# EAGLE board Spectrum_Shield_Panel_v16 (EAGLE 7.3.0), part 1 of 3
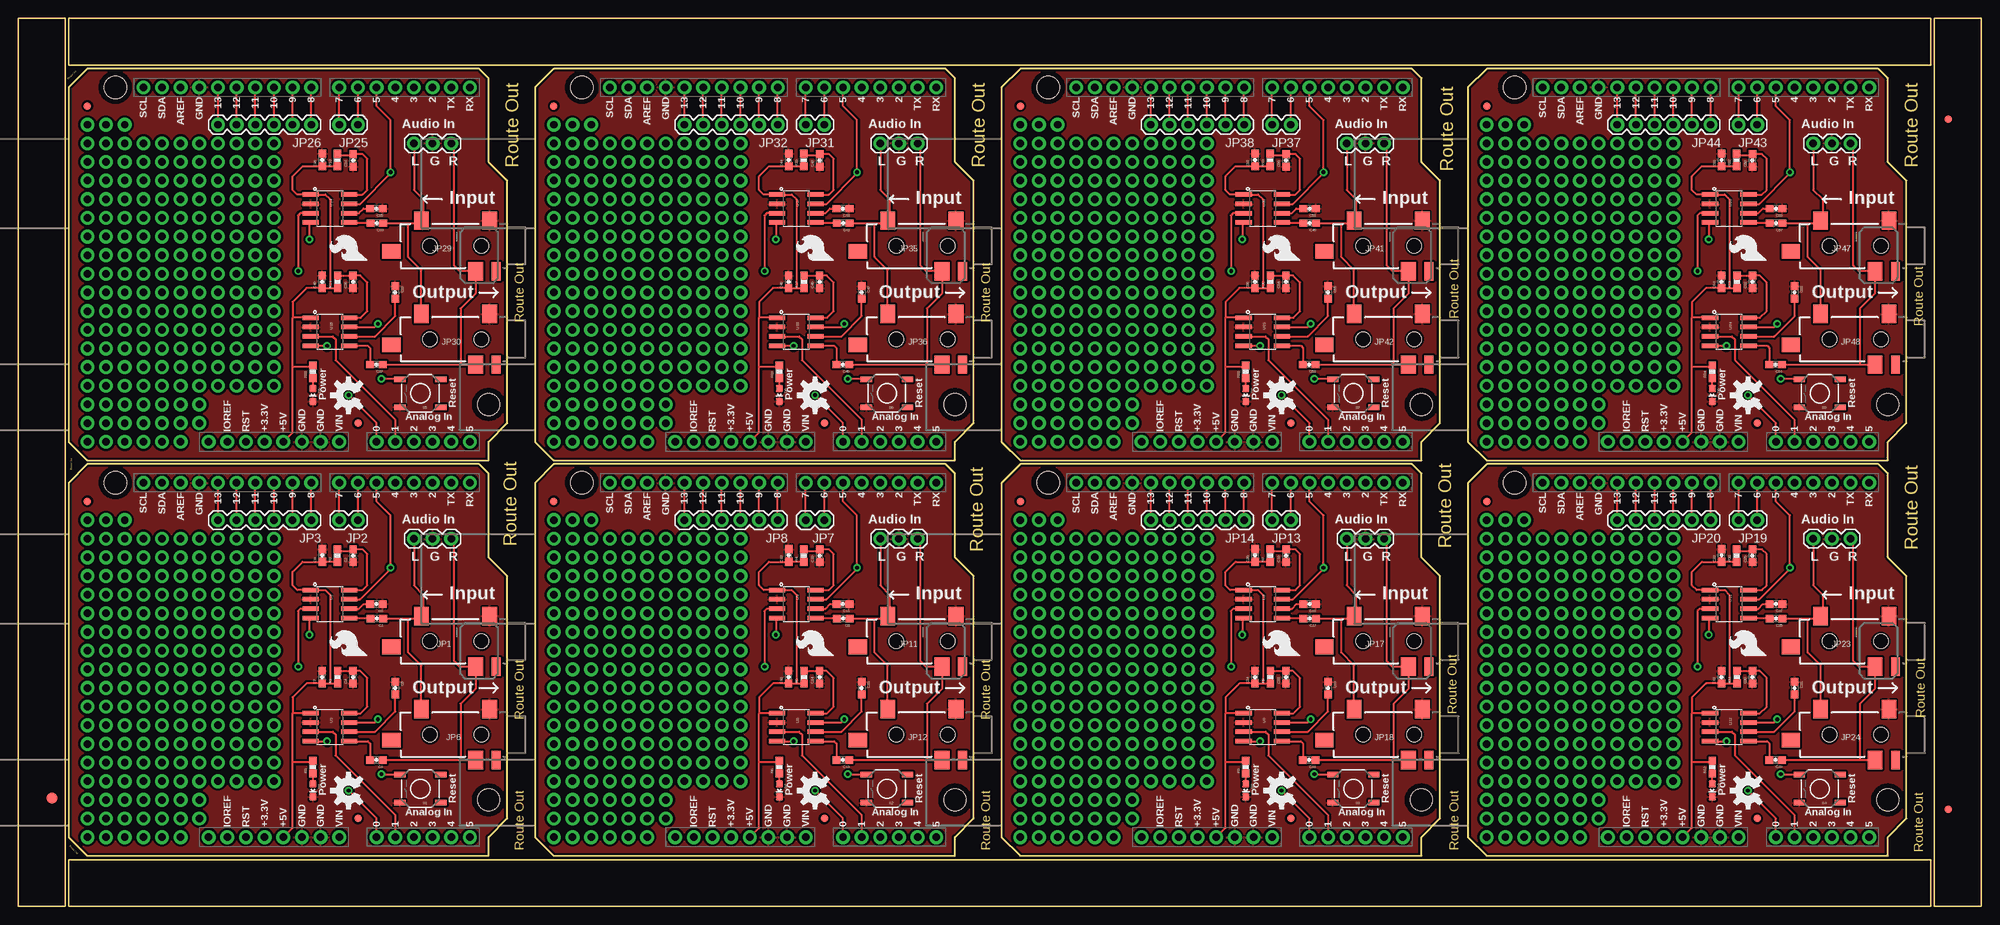
[diagram p0: board, top side]
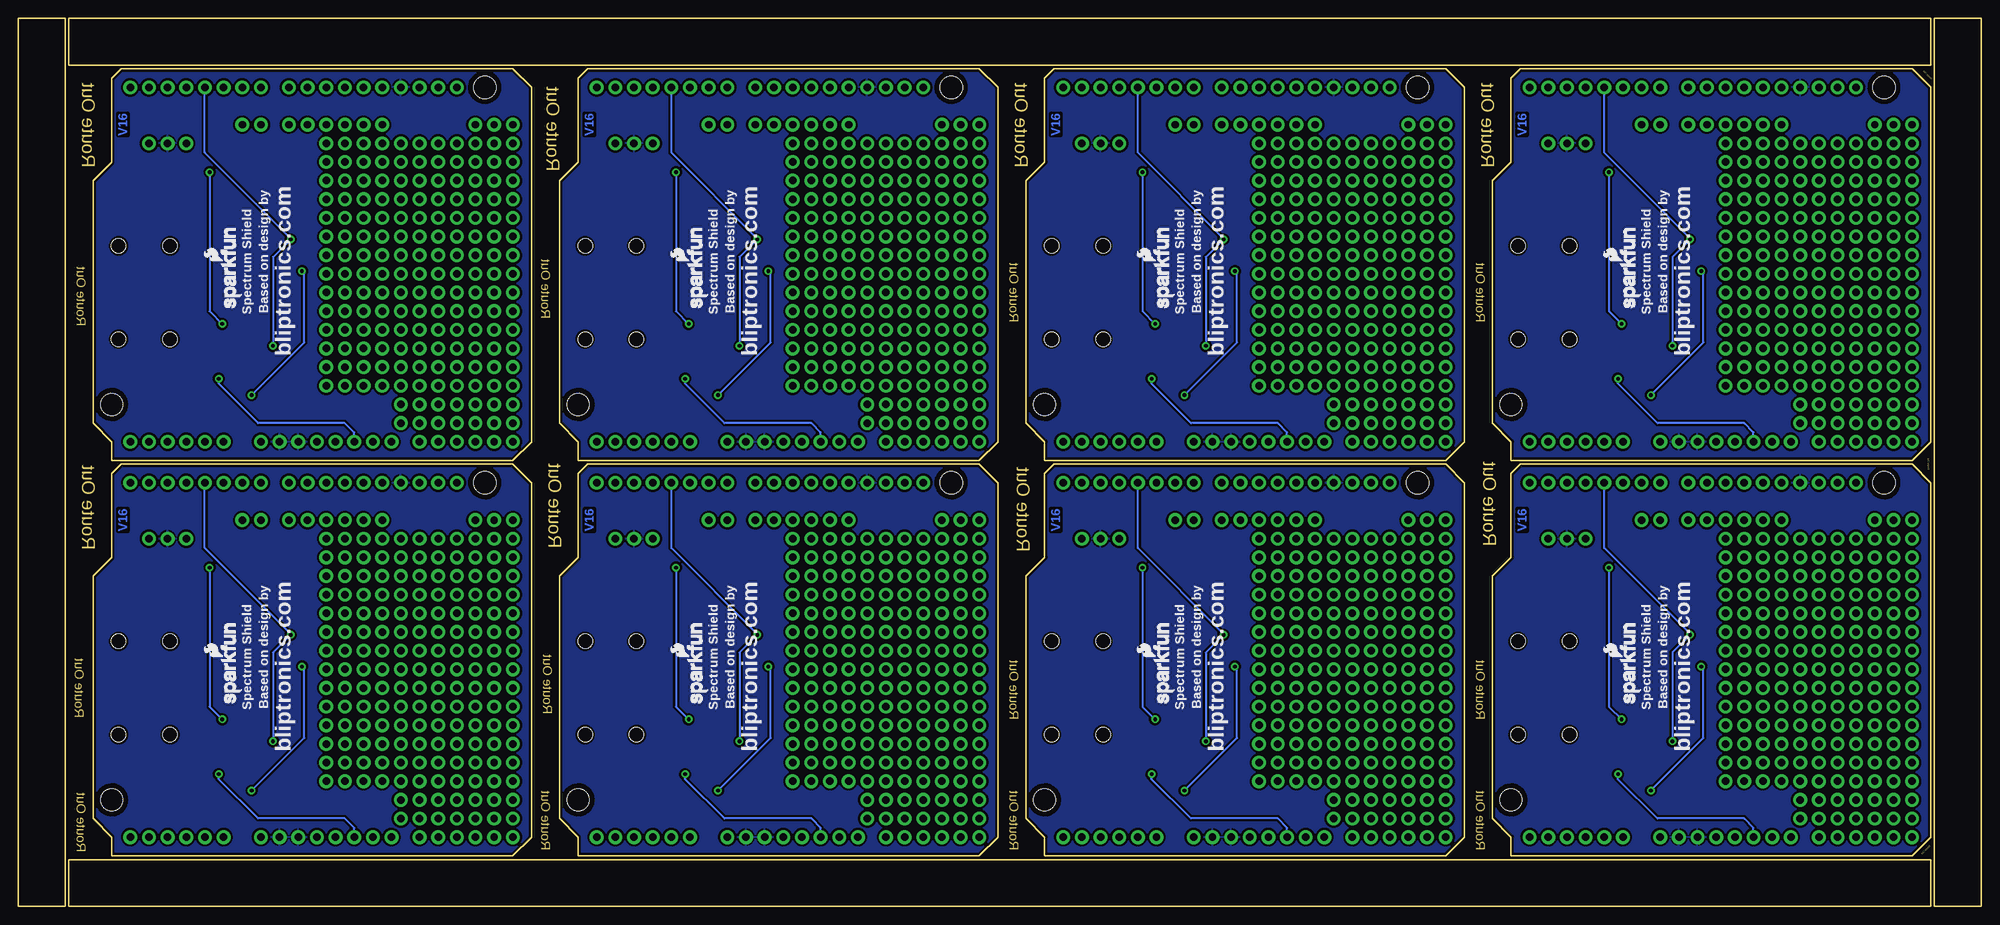
[diagram p1: board, bottom side, seen from below]

Size 267.21 x 120.9 mm. Coordinates in mm from the lower left corner, seen from the top.
Outline: 9.4,6.86 64.01,6.86 64.01,9.4 66.55,11.94 66.55,44.96 64.01,47.5 64.01,58.93 62.74,60.2 9.4,60.2 6.86,57.66 6.86,9.4 9.4,6.86
Outline: 72.9,6.86 127.51,6.86 127.51,9.4 130.05,11.94 130.05,44.96 127.51,47.5 127.51,58.93 126.24,60.2 72.9,60.2 70.36,57.66 70.36,9.4 72.9,6.86
Outline: 136.4,6.86 191.01,6.86 191.01,9.4 193.55,11.94 193.55,44.96 191.01,47.5 191.01,58.93 189.74,60.2 136.4,60.2 133.86,57.66 133.86,9.4 136.4,6.86
Outline: 199.9,6.86 254.51,6.86 254.51,9.4 257.05,11.94 257.05,44.96 254.51,47.5 254.51,58.93 253.24,60.2 199.9,60.2 197.36,57.66 197.36,9.4 199.9,6.86
Outline: 9.4,60.71 64.01,60.71 64.01,63.25 66.55,65.79 66.55,98.81 64.01,101.35 64.01,112.78 62.74,114.05 9.4,114.05 6.86,111.51 6.86,63.25 9.4,60.71
Outline: 72.9,60.71 127.51,60.71 127.51,63.25 130.05,65.79 130.05,98.81 127.51,101.35 127.51,112.78 126.24,114.05 72.9,114.05 70.36,111.51 70.36,63.25 72.9,60.71
Outline: 136.4,60.71 191.01,60.71 191.01,63.25 193.55,65.79 193.55,98.81 191.01,101.35 191.01,112.78 189.74,114.05 136.4,114.05 133.86,111.51 133.86,63.25 136.4,60.71
Outline: 199.9,60.71 254.51,60.71 254.51,63.25 257.05,65.79 257.05,98.81 254.51,101.35 254.51,112.78 253.24,114.05 199.9,114.05 197.36,111.51 197.36,63.25 199.9,60.71
Outline: 267.21,0 267.21,120.9 260.86,120.9 260.86,0 267.21,0
Outline: 0,120.9 0,0 6.35,0 6.35,120.9 0,120.9
Outline: 6.86,114.55 260.35,114.55 260.35,120.9 6.86,120.9 6.86,114.55
Outline: 260.35,6.35 6.86,6.35 6.86,0 260.35,0 260.35,6.35
Copper layers (1*16): Top 0.035mm / dielectric 1.5mm / Bottom 0.035mm
Design rules "SparkFun-2-layer": minimum track width 7mil, minimum drill 15mil, track to track 8mil, track to pad 8mil, pad to pad 8mil, via to via 8mil, smd to smd 8mil, copper to edge 8mil, drill to drill 8mil, minimum pad ring 12mil, minimum via ring 10mil, stop-mask expansion 4mil, vias tented up to drill 20mil, thermal gap 10mil

## Footprints (pad centres in the part's own frame; a part is rotated, then mirrored left to right if it is on the bottom)
1X03 = drill 1.016 pad 1.88: 1 0,0; 2 2.54,0; 3 5.08,0
0603-CAP = smd 1.1 x 1: 1 -0.85,0; 2 0.85,0
LED-0603 = smd 1 x 1: A 0,-0.877; C 0,0.877
FIDUCIAL-1X2 = smd 1 x 1: 1 0,0
FIDUCIAL-1.5X3 = smd 1.5 x 1.5: 1 0,0
AUDIO-JACK-3.5MM-SMD = smd 2 x 2.5: RING 4.3,3.45; SLEEVE 2.4,-3.45; TIP 11.7,-3.45 | smd 1.2 x 2.5: RSH 1.5,3.45 | smd 2.5 x 2: TSH 15.75,0.75 | hole 2: 3.5,0; 10.5,0
1X02 = drill 1.016 pad 1.88: 1 0,0; 2 2.54,0
1X06 = drill 1.016 pad 1.88: 1 0,0; 2 2.54,0; 3 5.08,0; 4 7.62,0; 5 10.16,0; 6 12.7,0
0603-RES = smd 1.1 x 1: 1 -0.85,0; 2 0.85,0
TACTILE-SWITCH-SMD = smd 1.524 x 0.762: 1 -2.794,1.905; 2 2.794,1.905; 3 -2.794,-1.905; 4 2.794,-1.905
UNO_R3_SHIELD = drill 1.016 pad 1.88: 3.3V 50.8,26.67; 5V 50.8,29.21; A0 50.8,41.91; A1 50.8,44.45; A2 50.8,46.99; A3 50.8,49.53; A4 50.8,52.07; A5 50.8,54.61; AREF 2.54,15.24; D2 2.54,49.53; D3 2.54,46.99; D4 2.54,44.45; D5 2.54,41.91; D6 2.54,39.37; D7 2.54,36.83; D8 2.54,33.02; D9 2.54,30.48; D10 2.54,27.94; D11 2.54,25.4; D12 2.54,22.86; D13 2.54,20.32; GND@0 50.8,31.75; GND@1 50.8,34.29; GND@2 2.54,17.78; IOREF 50.8,21.59; NC 50.8,19.05; RES 50.8,24.13; RX 2.54,54.61; SCL 2.54,10.16; SDA 2.54,12.7; TX 2.54,52.07; VIN 50.8,36.83
SOIC8 = smd 0.61 x 2.21: 1 -1.905,-2.616; 2 -0.635,-2.616; 3 0.635,-2.616; 4 1.905,-2.616; 5 1.905,2.616; 6 0.635,2.616; 7 -0.635,2.616; 8 -1.905,2.616
STAND-OFF-TIGHT = hole 3.048: 0,0

## Placement (x,y rotation side)
AUDIO_IN  JUMPER-3PTH  [1X03]  53.85,50.04 0 top
AUDIO_IN1  JUMPER-3PTH  [1X03]  117.35,50.04 0 top
AUDIO_IN2  JUMPER-3PTH  [1X03]  180.85,50.04 0 top
AUDIO_IN3  JUMPER-3PTH  [1X03]  244.35,50.04 0 top
AUDIO_IN4  JUMPER-3PTH  [1X03]  53.85,103.89 0 top
AUDIO_IN5  JUMPER-3PTH  [1X03]  117.35,103.89 0 top
AUDIO_IN6  JUMPER-3PTH  [1X03]  180.85,103.89 0 top
AUDIO_IN7  JUMPER-3PTH  [1X03]  244.35,103.89 0 top
C1  1nF  [0603-CAP]  48.79,39.17 180 top
C2  33pF  [0603-CAP]  45.58,47.73 90 top
C3  1nF  [0603-CAP]  48.74,19.91 180 top
C4  33pF  [0603-CAP]  45.57,31.19 90 top
C5  0.1uF  [0603-CAP]  51.31,29.72 270 top
C6  0.1uF  [0603-CAP]  48.77,41.15 180 top
C7  0.1uF  [0603-CAP]  41.35,31.19 90 top
C8  0.1uF  [0603-CAP]  41.37,47.76 90 top
C9  1nF  [0603-CAP]  112.29,39.17 180 top
C10  33pF  [0603-CAP]  109.08,47.73 90 top
C11  0.1uF  [0603-CAP]  112.27,41.15 180 top
C12  0.1uF  [0603-CAP]  104.87,47.76 90 top
C13  1nF  [0603-CAP]  112.24,19.91 180 top
C14  33pF  [0603-CAP]  109.07,31.19 90 top
C15  0.1uF  [0603-CAP]  114.81,29.72 270 top
C16  0.1uF  [0603-CAP]  104.85,31.19 90 top
C17  1nF  [0603-CAP]  175.79,39.17 180 top
C18  33pF  [0603-CAP]  172.58,47.73 90 top
C19  0.1uF  [0603-CAP]  175.77,41.15 180 top
C20  0.1uF  [0603-CAP]  168.37,47.76 90 top
C21  1nF  [0603-CAP]  175.74,19.91 180 top
C22  33pF  [0603-CAP]  172.57,31.19 90 top
C23  0.1uF  [0603-CAP]  178.31,29.72 270 top
C24  0.1uF  [0603-CAP]  168.35,31.19 90 top
C25  1nF  [0603-CAP]  239.29,39.17 180 top
C26  33pF  [0603-CAP]  236.08,47.73 90 top
C27  0.1uF  [0603-CAP]  239.27,41.15 180 top
C28  0.1uF  [0603-CAP]  231.87,47.76 90 top
C29  1nF  [0603-CAP]  239.24,19.91 180 top
C30  33pF  [0603-CAP]  236.07,31.19 90 top
C31  0.1uF  [0603-CAP]  241.81,29.72 270 top
C32  0.1uF  [0603-CAP]  231.85,31.19 90 top
C33  1nF  [0603-CAP]  48.79,93.01 180 top
C34  33pF  [0603-CAP]  45.58,101.58 90 top
C35  0.1uF  [0603-CAP]  48.77,95 180 top
C36  0.1uF  [0603-CAP]  41.37,101.61 90 top
C37  1nF  [0603-CAP]  48.74,73.76 180 top
C38  33pF  [0603-CAP]  45.57,85.04 90 top
C39  0.1uF  [0603-CAP]  51.31,83.57 270 top
C40  0.1uF  [0603-CAP]  41.35,85.04 90 top
C41  1nF  [0603-CAP]  112.29,93.01 180 top
C42  33pF  [0603-CAP]  109.08,101.58 90 top
C43  0.1uF  [0603-CAP]  112.27,95 180 top
C44  0.1uF  [0603-CAP]  104.87,101.61 90 top
C45  1nF  [0603-CAP]  112.24,73.76 180 top
C46  33pF  [0603-CAP]  109.07,85.04 90 top
C47  0.1uF  [0603-CAP]  114.81,83.57 270 top
C48  0.1uF  [0603-CAP]  104.85,85.04 90 top
C49  1nF  [0603-CAP]  175.79,93.01 180 top
C50  33pF  [0603-CAP]  172.58,101.58 90 top
C51  0.1uF  [0603-CAP]  175.77,95 180 top
C52  0.1uF  [0603-CAP]  168.37,101.61 90 top
C53  1nF  [0603-CAP]  175.74,73.76 180 top
C54  33pF  [0603-CAP]  172.57,85.04 90 top
C55  0.1uF  [0603-CAP]  178.31,83.57 270 top
C56  0.1uF  [0603-CAP]  168.35,85.04 90 top
C57  1nF  [0603-CAP]  239.29,93.01 180 top
C58  33pF  [0603-CAP]  236.08,101.58 90 top
C59  0.1uF  [0603-CAP]  239.27,95 180 top
C60  0.1uF  [0603-CAP]  231.87,101.61 90 top
C61  1nF  [0603-CAP]  239.24,73.76 180 top
C62  33pF  [0603-CAP]  236.07,85.04 90 top
C63  0.1uF  [0603-CAP]  241.81,83.57 270 top
C64  0.1uF  [0603-CAP]  231.85,85.04 90 top
D1  RED  [LED-0603]  40.11,15.77 180 top
D2  RED  [LED-0603]  103.61,15.77 180 top
D3  RED  [LED-0603]  167.11,15.77 180 top
D4  RED  [LED-0603]  230.61,15.77 180 top
D5  RED  [LED-0603]  40.11,69.62 180 top
D6  RED  [LED-0603]  103.61,69.62 180 top
D7  RED  [LED-0603]  167.11,69.62 180 top
D8  RED  [LED-0603]  230.61,69.62 180 top
E$1  [FIDUCIAL-1X2]  262.76,13.21 0 top
E$2  [FIDUCIAL-1X2]  262.76,107.19 180 top
E$3  [FIDUCIAL-1.5X3]  4.57,14.73 0 top
JP1  3.5mm Audio Jack  [AUDIO-JACK-3.5MM-SMD]  66.55,36.07 180 top
JP2  [1X02]  46.23,52.58 180 top
JP3  [1X06]  39.88,52.58 180 top
JP4  FIDUCIAL1X2  [FIDUCIAL-1X2]  46.23,11.94 0 top
JP5  FIDUCIAL1X2  [FIDUCIAL-1X2]  9.4,55.12 0 top
JP6  3.5mm Audio Jack  [AUDIO-JACK-3.5MM-SMD]  66.55,23.37 180 top
JP7  [1X02]  109.73,52.58 180 top
JP8  [1X06]  103.38,52.58 180 top
JP9  FIDUCIAL1X2  [FIDUCIAL-1X2]  109.73,11.94 0 top
JP10  FIDUCIAL1X2  [FIDUCIAL-1X2]  72.9,55.12 0 top
JP11  3.5mm Audio Jack  [AUDIO-JACK-3.5MM-SMD]  130.05,36.07 180 top
JP12  3.5mm Audio Jack  [AUDIO-JACK-3.5MM-SMD]  130.05,23.37 180 top
JP13  [1X02]  173.23,52.58 180 top
JP14  [1X06]  166.88,52.58 180 top
JP15  FIDUCIAL1X2  [FIDUCIAL-1X2]  173.23,11.94 0 top
JP16  FIDUCIAL1X2  [FIDUCIAL-1X2]  136.4,55.12 0 top
JP17  3.5mm Audio Jack  [AUDIO-JACK-3.5MM-SMD]  193.55,36.07 180 top
JP18  3.5mm Audio Jack  [AUDIO-JACK-3.5MM-SMD]  193.55,23.37 180 top
JP19  [1X02]  236.73,52.58 180 top
JP20  [1X06]  230.38,52.58 180 top
JP21  FIDUCIAL1X2  [FIDUCIAL-1X2]  236.73,11.94 0 top
JP22  FIDUCIAL1X2  [FIDUCIAL-1X2]  199.9,55.12 0 top
JP23  3.5mm Audio Jack  [AUDIO-JACK-3.5MM-SMD]  257.05,36.07 180 top
JP24  3.5mm Audio Jack  [AUDIO-JACK-3.5MM-SMD]  257.05,23.37 180 top
JP25  [1X02]  46.23,106.43 180 top
JP26  [1X06]  39.88,106.43 180 top
JP27  FIDUCIAL1X2  [FIDUCIAL-1X2]  46.23,65.79 0 top
JP28  FIDUCIAL1X2  [FIDUCIAL-1X2]  9.4,108.97 0 top
JP29  3.5mm Audio Jack  [AUDIO-JACK-3.5MM-SMD]  66.55,89.92 180 top
JP30  3.5mm Audio Jack  [AUDIO-JACK-3.5MM-SMD]  66.55,77.22 180 top
JP31  [1X02]  109.73,106.43 180 top
JP32  [1X06]  103.38,106.43 180 top
JP33  FIDUCIAL1X2  [FIDUCIAL-1X2]  109.73,65.79 0 top
JP34  FIDUCIAL1X2  [FIDUCIAL-1X2]  72.9,108.97 0 top
JP35  3.5mm Audio Jack  [AUDIO-JACK-3.5MM-SMD]  130.05,89.92 180 top
JP36  3.5mm Audio Jack  [AUDIO-JACK-3.5MM-SMD]  130.05,77.22 180 top
JP37  [1X02]  173.23,106.43 180 top
JP38  [1X06]  166.88,106.43 180 top
JP39  FIDUCIAL1X2  [FIDUCIAL-1X2]  173.23,65.79 0 top
JP40  FIDUCIAL1X2  [FIDUCIAL-1X2]  136.4,108.97 0 top
JP41  3.5mm Audio Jack  [AUDIO-JACK-3.5MM-SMD]  193.55,89.92 180 top
JP42  3.5mm Audio Jack  [AUDIO-JACK-3.5MM-SMD]  193.55,77.22 180 top
JP43  [1X02]  236.73,106.43 180 top
JP44  [1X06]  230.38,106.43 180 top
JP45  FIDUCIAL1X2  [FIDUCIAL-1X2]  236.73,65.79 0 top
JP46  FIDUCIAL1X2  [FIDUCIAL-1X2]  199.9,108.97 0 top
JP47  3.5mm Audio Jack  [AUDIO-JACK-3.5MM-SMD]  257.05,89.92 180 top
JP48  3.5mm Audio Jack  [AUDIO-JACK-3.5MM-SMD]  257.05,77.22 180 top
LOGO1  OSHW-LOGOM  [OSHW-LOGO-M]  44.96,15.75 90 top
LOGO2  SFE_LOGO_FLAME.2_INCH  [SFE_LOGO_FLAME_.2]  47.75,33.78 90 top
LOGO3  SFE_LOGO_NAME_FLAME.1_INCH  [SFE_LOGO_NAME_FLAME_.1]  46.23,27.18 90 bottom
LOGO4  OSHW-LOGOM  [OSHW-LOGO-M]  108.46,15.75 90 top
LOGO5  SFE_LOGO_NAME_FLAME.1_INCH  [SFE_LOGO_NAME_FLAME_.1]  109.73,27.18 90 bottom
LOGO6  SFE_LOGO_FLAME.2_INCH  [SFE_LOGO_FLAME_.2]  111.25,33.78 90 top
LOGO7  OSHW-LOGOM  [OSHW-LOGO-M]  171.96,15.75 90 top
LOGO8  SFE_LOGO_NAME_FLAME.1_INCH  [SFE_LOGO_NAME_FLAME_.1]  173.23,27.18 90 bottom
LOGO9  SFE_LOGO_FLAME.2_INCH  [SFE_LOGO_FLAME_.2]  174.75,33.78 90 top
LOGO10  OSHW-LOGOM  [OSHW-LOGO-M]  235.46,15.75 90 top
LOGO11  SFE_LOGO_NAME_FLAME.1_INCH  [SFE_LOGO_NAME_FLAME_.1]  236.73,27.18 90 bottom
LOGO12  SFE_LOGO_FLAME.2_INCH  [SFE_LOGO_FLAME_.2]  238.25,33.78 90 top
LOGO13  OSHW-LOGOM  [OSHW-LOGO-M]  44.96,69.6 90 top
LOGO14  SFE_LOGO_NAME_FLAME.1_INCH  [SFE_LOGO_NAME_FLAME_.1]  46.23,81.03 90 bottom
LOGO15  SFE_LOGO_FLAME.2_INCH  [SFE_LOGO_FLAME_.2]  47.75,87.63 90 top
LOGO16  OSHW-LOGOM  [OSHW-LOGO-M]  108.46,69.6 90 top
LOGO17  SFE_LOGO_NAME_FLAME.1_INCH  [SFE_LOGO_NAME_FLAME_.1]  109.73,81.03 90 bottom
LOGO18  SFE_LOGO_FLAME.2_INCH  [SFE_LOGO_FLAME_.2]  111.25,87.63 90 top
LOGO19  OSHW-LOGOM  [OSHW-LOGO-M]  171.96,69.6 90 top
LOGO20  SFE_LOGO_NAME_FLAME.1_INCH  [SFE_LOGO_NAME_FLAME_.1]  173.23,81.03 90 bottom
LOGO21  SFE_LOGO_FLAME.2_INCH  [SFE_LOGO_FLAME_.2]  174.75,87.63 90 top
LOGO22  OSHW-LOGOM  [OSHW-LOGO-M]  235.46,69.6 90 top
LOGO23  SFE_LOGO_NAME_FLAME.1_INCH  [SFE_LOGO_NAME_FLAME_.1]  236.73,81.03 90 bottom
LOGO24  SFE_LOGO_FLAME.2_INCH  [SFE_LOGO_FLAME_.2]  238.25,87.63 90 top
R1  200k  [0603-RES]  43.46,31.19 90 top
R2  200k  [0603-RES]  43.43,47.75 90 top
R3  330  [0603-RES]  40.11,18.95 90 top
R4  200k  [0603-RES]  106.93,47.75 90 top
R5  200k  [0603-RES]  106.96,31.19 90 top
R6  330  [0603-RES]  103.61,18.95 90 top
R7  200k  [0603-RES]  170.43,47.75 90 top
R8  200k  [0603-RES]  170.46,31.19 90 top
R9  330  [0603-RES]  167.11,18.95 90 top
R10  200k  [0603-RES]  233.93,47.75 90 top
R11  200k  [0603-RES]  233.96,31.19 90 top
R12  330  [0603-RES]  230.61,18.95 90 top
R13  200k  [0603-RES]  43.43,101.6 90 top
R14  200k  [0603-RES]  43.46,85.04 90 top
R15  330  [0603-RES]  40.11,72.8 90 top
R16  200k  [0603-RES]  106.93,101.6 90 top
R17  200k  [0603-RES]  106.96,85.04 90 top
R18  330  [0603-RES]  103.61,72.8 90 top
R19  200k  [0603-RES]  170.43,101.6 90 top
R20  200k  [0603-RES]  170.46,85.04 90 top
R21  330  [0603-RES]  167.11,72.8 90 top
R22  200k  [0603-RES]  233.93,101.6 90 top
R23  200k  [0603-RES]  233.96,85.04 90 top
R24  330  [0603-RES]  230.61,72.8 90 top
S1  TAC_SWITCHSMD  [TACTILE-SWITCH-SMD]  54.74,16 180 top
S2  TAC_SWITCHSMD  [TACTILE-SWITCH-SMD]  118.24,16 180 top
S3  TAC_SWITCHSMD  [TACTILE-SWITCH-SMD]  181.74,16 180 top
S4  TAC_SWITCHSMD  [TACTILE-SWITCH-SMD]  245.24,16 180 top
S5  TAC_SWITCHSMD  [TACTILE-SWITCH-SMD]  54.74,69.85 180 top
S6  TAC_SWITCHSMD  [TACTILE-SWITCH-SMD]  118.24,69.85 180 top
S7  TAC_SWITCHSMD  [TACTILE-SWITCH-SMD]  181.74,69.85 180 top
S8  TAC_SWITCHSMD  [TACTILE-SWITCH-SMD]  245.24,69.85 180 top
U1  ARDUINO_R3_SHIELD  [UNO_R3_SHIELD]  6.86,60.2 270 top
U2  MSGEQ7SOIC  [SOIC8]  42.42,41.15 270 top
U3  MSGEQ7SOIC  [SOIC8]  42.42,24.38 270 top
U4  ARDUINO_R3_SHIELD  [UNO_R3_SHIELD]  70.36,60.2 270 top
U5  MSGEQ7SOIC  [SOIC8]  105.92,41.15 270 top
U6  MSGEQ7SOIC  [SOIC8]  105.92,24.38 270 top
U7  ARDUINO_R3_SHIELD  [UNO_R3_SHIELD]  133.86,60.2 270 top
U8  MSGEQ7SOIC  [SOIC8]  169.42,41.15 270 top
U9  MSGEQ7SOIC  [SOIC8]  169.42,24.38 270 top
U10  ARDUINO_R3_SHIELD  [UNO_R3_SHIELD]  197.36,60.2 270 top
U11  MSGEQ7SOIC  [SOIC8]  232.92,41.15 270 top
U12  MSGEQ7SOIC  [SOIC8]  232.92,24.38 270 top
U13  ARDUINO_R3_SHIELD  [UNO_R3_SHIELD]  6.86,114.05 270 top
U14  MSGEQ7SOIC  [SOIC8]  42.42,95 270 top
U15  MSGEQ7SOIC  [SOIC8]  42.42,78.23 270 top
U16  ARDUINO_R3_SHIELD  [UNO_R3_SHIELD]  70.36,114.05 270 top
U17  MSGEQ7SOIC  [SOIC8]  105.92,95 270 top
U18  MSGEQ7SOIC  [SOIC8]  105.92,78.23 270 top
U19  ARDUINO_R3_SHIELD  [UNO_R3_SHIELD]  133.86,114.05 270 top
U20  MSGEQ7SOIC  [SOIC8]  169.42,95 270 top
U21  MSGEQ7SOIC  [SOIC8]  169.42,78.23 270 top
U22  ARDUINO_R3_SHIELD  [UNO_R3_SHIELD]  197.36,114.05 270 top
U23  MSGEQ7SOIC  [SOIC8]  232.92,95 270 top
U24  MSGEQ7SOIC  [SOIC8]  232.92,78.23 270 top
U$1  [STAND-OFF-TIGHT]  64.01,14.48 0 top
U$2  [STAND-OFF-TIGHT]  127.51,14.48 0 top
U$3  [STAND-OFF-TIGHT]  13.21,57.66 0 top
U$4  [STAND-OFF-TIGHT]  76.71,57.66 0 top
U$5  [STAND-OFF-TIGHT]  191.01,14.48 0 top
U$6  [STAND-OFF-TIGHT]  140.21,57.66 0 top
U$7  [STAND-OFF-TIGHT]  254.51,14.48 0 top
U$8  [STAND-OFF-TIGHT]  203.71,57.66 0 top
U$9  [STAND-OFF-TIGHT]  64.01,68.33 0 top
U$10  [STAND-OFF-TIGHT]  13.21,111.51 0 top
U$11  [STAND-OFF-TIGHT]  127.51,68.33 0 top
U$12  [STAND-OFF-TIGHT]  76.71,111.51 0 top
U$13  [STAND-OFF-TIGHT]  191.01,68.33 0 top
U$14  [STAND-OFF-TIGHT]  140.21,111.51 0 top
U$15  [STAND-OFF-TIGHT]  254.51,68.33 0 top
U$16  [STAND-OFF-TIGHT]  203.71,111.51 0 top

## Library data of the parts
AUDIO_IN AUDIO_IN1-AUDIO_IN7 JP2-JP5 JP7-JP10 JP13-JP16 JP19-JP22 JP25-JP28 JP31-JP34 JP37-JP40 JP43-JP46 = SparkFun
C1 C3 C9 C13 C17 C21 C25 C29 C33 C37 C41 C45 C49 C53 C57 C61 = SparkFun-Capacitors; PROD_ID: CAP-07886
C2 C4 C10 C14 C18 C22 C26 C30 C34 C38 C42 C46 C50 C54 C58 C62 = SparkFun-Capacitors; PROD_ID: CAP-10142
C5-C8 C11 C12 C15 C16 C19 C20 C23 C24 C27 C28 C31 C32 C35 C36 C39 C40 C43 C44 C47 C48 C51 C52 C55 C56 C59 C60 C63 C64 = SparkFun-Capacitors; PROD_ID: CAP-00810
D1-D8 = SparkFun-LED; PROD_ID: DIO-00819
E$1 E$2 LOGO1-LOGO24 = SparkFun-Aesthetics
E$3 = SparkFun-Retired
JP1 JP6 JP11 JP12 JP17 JP18 JP23 JP24 JP29 JP30 JP35 JP36 JP41 JP42 JP47 JP48 = SparkFun-Connectors; PROD_ID: CONN-10353
R1 R5 R8 R11 R14 R17 R20 R23 = SparkFun-Resistors; PROD_ID: RES-09385
R2 R4 R7 R10 R13 R16 R19 R22 = SparkFun-Resistors; PROD_ID: RES-08969
R3 R6 R9 R12 R15 R18 R21 R24 = SparkFun-Resistors; PROD_ID: RES-00818
S1-S8 = SparkFun-Retired; PROD_ID: SWCH-08247
U1 U4 U7 U10 U13 U16 U19 U22 = SparkFun-Boards
U2 U3 U5 U6 U8 U9 U11 U12 U14 U15 U17 U18 U20 U21 U23 U24 = SparkFun-AnalogIC; PROD_ID: IC-10141
U$1-U$16 = SparkFun-Electromechanical

## Nets
ANALOG0: U1.A0 U2.3
ANALOG1: U1.A1 U3.3
ANALOG2: U4.A0 U5.3
ANALOG3: U4.A1 U6.3
ANALOG4: U7.A0 U8.3
ANALOG5: U7.A1 U9.3
ANALOG6: U10.A0 U11.3
ANALOG7: U10.A1 U12.3
ANALOG8: U13.A0 U14.3
ANALOG9: U13.A1 U15.3
ANALOG10: U16.A0 U17.3
ANALOG11: U16.A1 U18.3
ANALOG12: U19.A0 U20.3
ANALOG13: U19.A1 U21.3
ANALOG14: U22.A0 U23.3
ANALOG15: U22.A1 U24.3
GND: AUDIO_IN.2 C2.1 C4.1 C5.1 C6.1 C7.2 C8.2 D1.C JP1.SLEEVE JP6.SLEEVE S1.2 U1.GND@0 U1.GND@1 U1.GND@2 U2.2 U3.2
GND1: AUDIO_IN1.2 C10.1 C11.1 C12.2 C14.1 C15.1 C16.2 D2.C JP11.SLEEVE JP12.SLEEVE S2.2 U4.GND@0 U4.GND@1 U4.GND@2 U5.2 U6.2
GND2: AUDIO_IN2.2 C18.1 C19.1 C20.2 C22.1 C23.1 C24.2 D3.C JP17.SLEEVE JP18.SLEEVE S3.2 U7.GND@0 U7.GND@1 U7.GND@2 U8.2 U9.2
GND3: AUDIO_IN3.2 C26.1 C27.1 C28.2 C30.1 C31.1 C32.2 D4.C JP23.SLEEVE JP24.SLEEVE S4.2 U10.GND@0 U10.GND@1 U10.GND@2 U11.2 U12.2
GND4: AUDIO_IN4.2 C34.1 C35.1 C36.2 C38.1 C39.1 C40.2 D5.C JP29.SLEEVE JP30.SLEEVE S5.2 U13.GND@0 U13.GND@1 U13.GND@2 U14.2 U15.2
GND5: AUDIO_IN5.2 C42.1 C43.1 C44.2 C46.1 C47.1 C48.2 D6.C JP35.SLEEVE JP36.SLEEVE S6.2 U16.GND@0 U16.GND@1 U16.GND@2 U17.2 U18.2
GND6: AUDIO_IN6.2 C50.1 C51.1 C52.2 C54.1 C55.1 C56.2 D7.C JP41.SLEEVE JP42.SLEEVE S7.2 U19.GND@0 U19.GND@1 U19.GND@2 U20.2 U21.2
GND7: AUDIO_IN7.2 C58.1 C59.1 C60.2 C62.1 C63.1 C64.2 D8.C JP47.SLEEVE JP48.SLEEVE S8.2 U22.GND@0 U22.GND@1 U22.GND@2 U23.2 U24.2
LEFT: AUDIO_IN.1 C1.1 JP1.TIP JP6.TIP
LEFT1: AUDIO_IN1.1 C9.1 JP11.TIP JP12.TIP
LEFT2: AUDIO_IN2.1 C17.1 JP17.TIP JP18.TIP
LEFT3: AUDIO_IN3.1 C25.1 JP23.TIP JP24.TIP
LEFT4: AUDIO_IN4.1 C33.1 JP29.TIP JP30.TIP
LEFT5: AUDIO_IN5.1 C41.1 JP35.TIP JP36.TIP
LEFT6: AUDIO_IN6.1 C49.1 JP41.TIP JP42.TIP
LEFT7: AUDIO_IN7.1 C57.1 JP47.TIP JP48.TIP
N$1: C1.2 U2.5
N$2: C3.2 U3.5
N$3: C4.2 R1.2 U3.8
N$4: C2.2 R2.2 U2.8
N$5: C5.2 U3.6
N$6: C6.2 U2.6
N$7: D1.A R3.1
N$8: JP2.1 U1.D6
N$9: JP2.2 U1.D7
N$10: JP3.1 U1.D8
N$11: JP3.2 U1.D9
N$12: JP3.3 U1.D10
N$13: JP3.4 U1.D11
N$14: JP3.5 U1.D12
N$15: JP3.6 U1.D13
N$134: C9.2 U5.5
N$149: C10.2 R4.2 U5.8
N$150: C11.2 U5.6
N$151: C13.2 U6.5
N$197: C14.2 R5.2 U6.8
N$198: C15.2 U6.6
N$199: D2.A R6.1
N$200: JP7.2 U4.D7
N$201: JP8.1 U4.D8
N$202: JP8.2 U4.D9
N$203: JP8.3 U4.D10
N$204: JP8.4 U4.D11
N$205: JP8.5 U4.D12
N$206: JP8.6 U4.D13
N$227: S1.4 U1.RES
N$385: S2.4 U4.RES
N$386: JP7.1 U4.D6
N$387: C17.2 U8.5
N$388: C18.2 R7.2 U8.8
N$389: C19.2 U8.6
N$390: C21.2 U9.5
N$391: C22.2 R8.2 U9.8
N$392: C23.2 U9.6
N$393: D3.A R9.1
N$394: JP13.2 U7.D7
N$395: JP14.1 U7.D8
N$396: JP14.2 U7.D9
N$397: JP14.3 U7.D10
N$398: JP14.4 U7.D11
N$399: JP14.5 U7.D12
N$400: JP14.6 U7.D13
N$578: S3.4 U7.RES
N$579: JP13.1 U7.D6
N$580: C25.2 U11.5
N$581: C26.2 R10.2 U11.8
N$582: C27.2 U11.6
N$583: C29.2 U12.5
N$584: C30.2 R11.2 U12.8
N$585: C31.2 U12.6
N$586: D4.A R12.1
N$587: JP19.2 U10.D7
N$588: JP20.1 U10.D8
N$589: JP20.2 U10.D9
N$590: JP20.3 U10.D10
N$591: JP20.4 U10.D11
N$592: JP20.5 U10.D12
N$593: JP20.6 U10.D13
N$771: S4.4 U10.RES
N$772: JP19.1 U10.D6
N$773: C33.2 U14.5
N$774: C34.2 R13.2 U14.8
N$775: C35.2 U14.6
N$776: C37.2 U15.5
N$777: C38.2 R14.2 U15.8
N$778: C39.2 U15.6
N$779: D5.A R15.1
N$780: JP25.2 U13.D7
N$781: JP26.1 U13.D8
N$782: JP26.2 U13.D9
N$783: JP26.3 U13.D10
N$784: JP26.4 U13.D11
N$785: JP26.5 U13.D12
N$786: JP26.6 U13.D13
N$964: S5.4 U13.RES
N$965: JP25.1 U13.D6
N$966: C41.2 U17.5
N$967: C42.2 R16.2 U17.8
N$968: C43.2 U17.6
N$969: C45.2 U18.5
N$970: C46.2 R17.2 U18.8
N$971: C47.2 U18.6
N$972: D6.A R18.1
N$973: JP31.2 U16.D7
N$974: JP32.1 U16.D8
N$975: JP32.2 U16.D9
N$976: JP32.3 U16.D10
N$977: JP32.4 U16.D11
N$978: JP32.5 U16.D12
N$979: JP32.6 U16.D13
N$1157: S6.4 U16.RES
N$1158: JP31.1 U16.D6
N$1159: C49.2 U20.5
N$1160: C50.2 R19.2 U20.8
N$1161: C51.2 U20.6
N$1162: C53.2 U21.5
N$1163: C54.2 R20.2 U21.8
N$1164: C55.2 U21.6
N$1165: D7.A R21.1
N$1166: JP37.2 U19.D7
N$1167: JP38.1 U19.D8
N$1168: JP38.2 U19.D9
N$1169: JP38.3 U19.D10
N$1170: JP38.4 U19.D11
N$1171: JP38.5 U19.D12
N$1172: JP38.6 U19.D13
N$1350: S7.4 U19.RES
N$1351: JP37.1 U19.D6
N$1352: C57.2 U23.5
N$1353: C58.2 R22.2 U23.8
N$1354: C59.2 U23.6
N$1355: C61.2 U24.5
N$1356: C62.2 R23.2 U24.8
N$1357: C63.2 U24.6
N$1358: D8.A R24.1
N$1359: JP43.2 U22.D7
N$1360: JP44.1 U22.D8
N$1361: JP44.2 U22.D9
N$1362: JP44.3 U22.D10
N$1363: JP44.4 U22.D11
N$1364: JP44.5 U22.D12
N$1365: JP44.6 U22.D13
N$1543: S8.4 U22.RES
N$1544: JP43.1 U22.D6
RESET: U1.D5 U2.7 U3.7
RESET1: U4.D5 U5.7 U6.7
RESET2: U7.D5 U8.7 U9.7
RESET3: U10.D5 U11.7 U12.7
RESET4: U13.D5 U14.7 U15.7
RESET5: U16.D5 U17.7 U18.7
RESET6: U19.D5 U20.7 U21.7
RESET7: U22.D5 U23.7 U24.7
RIGHT: AUDIO_IN.3 C3.1 JP1.RING JP6.RING
RIGHT1: AUDIO_IN1.3 C13.1 JP11.RING JP12.RING
RIGHT2: AUDIO_IN2.3 C21.1 JP17.RING JP18.RING
RIGHT3: AUDIO_IN3.3 C29.1 JP23.RING JP24.RING
RIGHT4: AUDIO_IN4.3 C37.1 JP29.RING JP30.RING
RIGHT5: AUDIO_IN5.3 C45.1 JP35.RING JP36.RING
RIGHT6: AUDIO_IN6.3 C53.1 JP41.RING JP42.RING
RIGHT7: AUDIO_IN7.3 C61.1 JP47.RING JP48.RING
STROBE: U1.D4 U2.4 U3.4
STROBE1: U4.D4 U5.4 U6.4
STROBE2: U7.D4 U8.4 U9.4
STROBE3: U10.D4 U11.4 U12.4
STROBE4: U13.D4 U14.4 U15.4
STROBE5: U16.D4 U17.4 U18.4
STROBE6: U19.D4 U20.4 U21.4
STROBE7: U22.D4 U23.4 U24.4
VCC: C7.1 C8.1 R1.1 R2.1 R3.2 U1.5V U2.1 U3.1
VCC1: C12.1 C16.1 R4.1 R5.1 R6.2 U4.5V U5.1 U6.1
VCC2: C20.1 C24.1 R7.1 R8.1 R9.2 U7.5V U8.1 U9.1
VCC3: C28.1 C32.1 R10.1 R11.1 R12.2 U10.5V U11.1 U12.1
VCC4: C36.1 C40.1 R13.1 R14.1 R15.2 U13.5V U14.1 U15.1
VCC5: C44.1 C48.1 R16.1 R17.1 R18.2 U16.5V U17.1 U18.1
VCC6: C52.1 C56.1 R19.1 R20.1 R21.2 U19.5V U20.1 U21.1
VCC7: C60.1 C64.1 R22.1 R23.1 R24.2 U22.5V U23.1 U24.1

## Tracks (layer width: path | path; a pad name or v marks a point on that pad's centre or on a via)
ANALOG0  (via drill 0.51)
  Top 0.254: U2.3 38.38,40.51 38.08,40.21 38.08,32.66 v38.1,32.64 | U1.A0 48.77,11.94 v44.96,15.75
  Bottom 0.254: v38.1,32.64 37.8,32.33 37.8,22.91 v44.96,15.75
ANALOG1
  Top 0.254: U3.3 42.8,23.75 43.18,23.37 43.18,20.52 51.28,12.42 51.28,9.42 U1.A1
ANALOG2  (via drill 0.51)
  Top 0.254: U5.3 101.88,40.51 101.58,40.21 101.58,32.66 v101.6,32.64 | U4.A0 112.27,11.94 v108.46,15.75
  Bottom 0.254: v101.6,32.64 101.3,32.33 101.3,22.91 v108.46,15.75
ANALOG3
  Top 0.254: U6.3 106.3,23.75 106.68,23.37 106.68,20.52 114.78,12.42 114.78,9.42 U4.A1
ANALOG4  (via drill 0.51)
  Top 0.254: U8.3 165.38,40.51 165.07,40.21 165.07,32.66 v165.1,32.64 | U7.A0 175.77,11.94 v171.96,15.75
  Bottom 0.254: v165.1,32.64 164.79,32.33 164.79,22.91 v171.96,15.75
ANALOG5
  Top 0.254: U9.3 169.8,23.75 170.18,23.37 170.18,20.52 178.28,12.42 178.28,9.42 U7.A1
ANALOG6  (via drill 0.51)
  Top 0.254: U11.3 228.88,40.51 228.57,40.21 228.57,32.66 v228.6,32.64 | U10.A0 239.27,11.94 v235.46,15.75
  Bottom 0.254: v228.6,32.64 228.29,32.33 228.29,22.91 v235.46,15.75
ANALOG7
  Top 0.254: U12.3 233.3,23.75 233.68,23.37 233.68,20.52 241.78,12.42 241.78,9.42 U10.A1
ANALOG8  (via drill 0.51)
  Top 0.254: U14.3 38.38,94.36 38.08,94.06 38.08,86.51 v38.1,86.49 | U13.A0 48.77,65.79 v44.96,69.6
  Bottom 0.254: v38.1,86.49 37.8,86.18 37.8,76.76 v44.96,69.6
ANALOG9
  Top 0.254: U15.3 42.8,77.6 43.18,77.22 43.18,74.37 51.28,66.27 51.28,63.27 U13.A1
ANALOG10  (via drill 0.51)
  Top 0.254: U17.3 101.88,94.36 101.58,94.06 101.58,86.51 v101.6,86.49 | U16.A0 112.27,65.79 v108.46,69.6
  Bottom 0.254: v101.6,86.49 101.3,86.18 101.3,76.76 v108.46,69.6
ANALOG11
  Top 0.254: U18.3 106.3,77.6 106.68,77.22 106.68,74.37 114.78,66.27 114.78,63.27 U16.A1
ANALOG12  (via drill 0.51)
  Top 0.254: U20.3 165.38,94.36 165.07,94.06 165.07,86.51 v165.1,86.49 | U19.A0 175.77,65.79 v171.96,69.6
  Bottom 0.254: v165.1,86.49 164.79,86.18 164.79,76.76 v171.96,69.6
ANALOG13
  Top 0.254: U21.3 169.8,77.6 170.18,77.22 170.18,74.37 178.28,66.27 178.28,63.27 U19.A1
ANALOG14  (via drill 0.51)
  Top 0.254: U23.3 228.88,94.36 228.57,94.06 228.57,86.51 v228.6,86.49 | U22.A0 239.27,65.79 v235.46,69.6
  Bottom 0.254: v228.6,86.49 228.29,86.18 228.29,76.76 v235.46,69.6
ANALOG15
  Top 0.254: U24.3 233.3,77.6 233.68,77.22 233.68,74.37 241.78,66.27 241.78,63.27 U22.A1
GND
  pour Top (isolate 0.305): 9.4,6.86 64.01,6.86 64.01,9.4 66.55,11.94 66.55,44.96 64.01,47.5 64.01,58.93 62.74,60.2 9.4,60.2 6.86,57.66 6.86,9.4
  pour Bottom (isolate 0.305): 9.4,60.2 6.86,57.66 6.86,9.4 9.4,6.86 64.01,6.86 64.01,9.4 66.55,11.94 66.55,44.96 64.01,47.5 64.01,58.93 62.74,60.2
GND1
  pour Top (isolate 0.305): 72.9,6.86 127.51,6.86 127.51,9.4 130.05,11.94 130.05,44.96 127.51,47.5 127.51,58.93 126.24,60.2 72.9,60.2 70.36,57.66 70.36,9.4
  pour Bottom (isolate 0.305): 72.9,60.2 70.36,57.66 70.36,9.4 72.9,6.86 127.51,6.86 127.51,9.4 130.05,11.94 130.05,44.96 127.51,47.5 127.51,58.93 126.24,60.2
GND2
  pour Top (isolate 0.305): 136.4,6.86 191.01,6.86 191.01,9.4 193.55,11.94 193.55,44.96 191.01,47.5 191.01,58.93 189.74,60.2 136.4,60.2 133.86,57.66 133.86,9.4
  pour Bottom (isolate 0.305): 136.4,60.2 133.86,57.66 133.86,9.4 136.4,6.86 191.01,6.86 191.01,9.4 193.55,11.94 193.55,44.96 191.01,47.5 191.01,58.93 189.74,60.2
GND3
  pour Top (isolate 0.305): 199.9,6.86 254.51,6.86 254.51,9.4 257.05,11.94 257.05,44.96 254.51,47.5 254.51,58.93 253.24,60.2 199.9,60.2 197.36,57.66 197.36,9.4
  pour Bottom (isolate 0.305): 199.9,60.2 197.36,57.66 197.36,9.4 199.9,6.86 254.51,6.86 254.51,9.4 257.05,11.94 257.05,44.96 254.51,47.5 254.51,58.93 253.24,60.2
GND4
  pour Top (isolate 0.305): 9.4,60.71 64.01,60.71 64.01,63.25 66.55,65.79 66.55,98.81 64.01,101.35 64.01,112.78 62.74,114.05 9.4,114.05 6.86,111.51 6.86,63.25
  pour Bottom (isolate 0.305): 9.4,114.05 6.86,111.51 6.86,63.25 9.4,60.71 64.01,60.71 64.01,63.25 66.55,65.79 66.55,98.81 64.01,101.35 64.01,112.78 62.74,114.05
GND5
  pour Top (isolate 0.305): 72.9,60.71 127.51,60.71 127.51,63.25 130.05,65.79 130.05,98.81 127.51,101.35 127.51,112.78 126.24,114.05 72.9,114.05 70.36,111.51 70.36,63.25
  pour Bottom (isolate 0.305): 72.9,114.05 70.36,111.51 70.36,63.25 72.9,60.71 127.51,60.71 127.51,63.25 130.05,65.79 130.05,98.81 127.51,101.35 127.51,112.78 126.24,114.05
GND6
  pour Top (isolate 0.305): 136.4,60.71 191.01,60.71 191.01,63.25 193.55,65.79 193.55,98.81 191.01,101.35 191.01,112.78 189.74,114.05 136.4,114.05 133.86,111.51 133.86,63.25
  pour Bottom (isolate 0.305): 136.4,114.05 133.86,111.51 133.86,63.25 136.4,60.71 191.01,60.71 191.01,63.25 193.55,65.79 193.55,98.81 191.01,101.35 191.01,112.78 189.74,114.05
GND7
  pour Top (isolate 0.305): 199.9,60.71 254.51,60.71 254.51,63.25 257.05,65.79 257.05,98.81 254.51,101.35 254.51,112.78 253.24,114.05 199.9,114.05 197.36,111.51 197.36,63.25
  pour Bottom (isolate 0.305): 199.9,114.05 197.36,111.51 197.36,63.25 199.9,60.71 254.51,60.71 254.51,63.25 257.05,65.79 257.05,98.81 254.51,101.35 254.51,112.78 253.24,114.05
LEFT
  Top 0.254: AUDIO_IN.1 53.85,43.69 55.12,42.42 55.12,39.79 JP1.TIP 54.5,39.17 53.09,39.17 | C1.1 53.09,39.17 | JP6.TIP 54.85,32.78 53.09,34.54 53.09,39.17
LEFT1
  Top 0.254: AUDIO_IN1.1 117.35,43.69 118.62,42.42 118.62,39.79 JP11.TIP 118,39.17 116.59,39.17 | C9.1 116.59,39.17 | JP12.TIP 118.35,32.78 116.59,34.54 116.59,39.17
LEFT2
  Top 0.254: AUDIO_IN2.1 180.85,43.69 182.12,42.42 182.12,39.79 JP17.TIP 181.5,39.17 180.09,39.17 | C17.1 180.09,39.17 | JP18.TIP 181.85,32.78 180.09,34.54 180.09,39.17
LEFT3
  Top 0.254: AUDIO_IN3.1 244.35,43.69 245.62,42.42 245.62,39.79 JP23.TIP 245,39.17 243.59,39.17 | C25.1 243.59,39.17 | JP24.TIP 245.35,32.78 243.59,34.54 243.59,39.17
LEFT4
  Top 0.254: AUDIO_IN4.1 53.85,97.54 55.12,96.27 55.12,93.64 JP29.TIP 54.5,93.02 53.09,93.02 | C33.1 53.09,93.02 | JP30.TIP 54.85,86.63 53.09,88.39 53.09,93.02
LEFT5
  Top 0.254: AUDIO_IN5.1 117.35,97.54 118.62,96.27 118.62,93.64 JP35.TIP 118,93.02 116.59,93.02 | C41.1 116.59,93.02 | JP36.TIP 118.35,86.63 116.59,88.39 116.59,93.02
LEFT6
  Top 0.254: AUDIO_IN6.1 180.85,97.54 182.12,96.27 182.12,93.64 JP41.TIP 181.5,93.02 180.09,93.02 | C49.1 180.09,93.02 | JP42.TIP 181.85,86.63 180.09,88.39 180.09,93.02
LEFT7
  Top 0.254: AUDIO_IN7.1 244.35,97.54 245.62,96.27 245.62,93.64 JP47.TIP 245,93.02 243.59,93.02 | C57.1 243.59,93.02 | JP48.TIP 245.35,86.63 243.59,88.39 243.59,93.02
N$1
  Top 0.254: U2.5 47.87,39.24 C1.2
N$2
  Top 0.254: U3.5 47.57,22.48 47.88,22.17 47.88,19.93 C3.2
N$3
  Top 0.254: U3.8 46.61,26.29 47.5,27.18 47.5,31.09 46.55,32.04 C4.2 R1.2
N$4
  Top 0.254: R2.2 43.63,48.4 45.4,48.4 C2.2 46.86,48.58 47.5,47.95 47.5,43.69 46.86,43.05 U2.8
N$5
  Top 0.254: U3.6 48.54,23.75 51.31,26.52 C5.2
N$6
  Top 0.254: U2.6 46.35,40.51 46.99,41.15 C6.2
N$7
  Top 0.254: D1.A R3.1
N$8
  Top 0.254: JP2.1 U1.D6
N$9
  Top 0.254: JP2.2 U1.D7
N$10
  Top 0.254: JP3.1 U1.D8
N$11
  Top 0.254: JP3.2 U1.D9
N$12
  Top 0.254: JP3.3 U1.D10
N$13
  Top 0.254: JP3.4 U1.D11
N$14
  Top 0.254: JP3.5 U1.D12
N$15
  Top 0.254: JP3.6 U1.D13
N$16  (via drill 1.02 pad 1.88)
  other vias: 9.4,50.04
N$17  (via drill 1.02 pad 1.88)
  other vias: 9.4,47.5
N$18  (via drill 1.02 pad 1.88)
  other vias: 9.4,44.96
N$19  (via drill 1.02 pad 1.88)
  other vias: 9.4,42.42
N$20  (via drill 1.02 pad 1.88)
  other vias: 9.4,39.88
N$21  (via drill 1.02 pad 1.88)
  other vias: 9.4,37.34
N$22  (via drill 1.02 pad 1.88)
  other vias: 9.4,34.8
N$23  (via drill 1.02 pad 1.88)
  other vias: 9.4,32.26
N$24  (via drill 1.02 pad 1.88)
  other vias: 9.4,29.72
N$25  (via drill 1.02 pad 1.88)
  other vias: 9.4,27.18
N$26  (via drill 1.02 pad 1.88)
  other vias: 9.4,24.64
N$27  (via drill 1.02 pad 1.88)
  other vias: 9.4,22.1
N$28  (via drill 1.02 pad 1.88)
  other vias: 9.4,19.56
N$29  (via drill 1.02 pad 1.88)
  other vias: 9.4,17.02
N$30  (via drill 1.02 pad 1.88)
  other vias: 9.4,14.48
N$31  (via drill 1.02 pad 1.88)
  other vias: 9.4,11.94
N$32  (via drill 1.02 pad 1.88)
  other vias: 9.4,9.4
N$33  (via drill 1.02 pad 1.88)
  other vias: 11.94,50.04
N$34  (via drill 1.02 pad 1.88)
  other vias: 11.94,47.5
N$35  (via drill 1.02 pad 1.88)
  other vias: 11.94,44.96
N$36  (via drill 1.02 pad 1.88)
  other vias: 11.94,42.42
N$37  (via drill 1.02 pad 1.88)
  other vias: 11.94,39.88
N$38  (via drill 1.02 pad 1.88)
  other vias: 11.94,37.34
N$39  (via drill 1.02 pad 1.88)
  other vias: 11.94,34.8
N$40  (via drill 1.02 pad 1.88)
  other vias: 11.94,32.26
N$41  (via drill 1.02 pad 1.88)
  other vias: 11.94,29.72
N$42  (via drill 1.02 pad 1.88)
  other vias: 11.94,27.18
N$43  (via drill 1.02 pad 1.88)
  other vias: 11.94,24.64
N$44  (via drill 1.02 pad 1.88)
  other vias: 11.94,22.1
N$45  (via drill 1.02 pad 1.88)
  other vias: 11.94,19.56
N$46  (via drill 1.02 pad 1.88)
  other vias: 11.94,17.02
N$47  (via drill 1.02 pad 1.88)
  other vias: 11.94,14.48
N$48  (via drill 1.02 pad 1.88)
  other vias: 11.94,11.94
N$49  (via drill 1.02 pad 1.88)
  other vias: 11.94,9.4
N$50  (via drill 1.02 pad 1.88)
  other vias: 14.48,50.04
N$51  (via drill 1.02 pad 1.88)
  other vias: 14.48,47.5
N$52  (via drill 1.02 pad 1.88)
  other vias: 14.48,44.96
N$53  (via drill 1.02 pad 1.88)
  other vias: 14.48,42.42
N$54  (via drill 1.02 pad 1.88)
  other vias: 14.48,39.88
N$55  (via drill 1.02 pad 1.88)
  other vias: 14.48,37.34
N$56  (via drill 1.02 pad 1.88)
  other vias: 14.48,34.8
N$57  (via drill 1.02 pad 1.88)
  other vias: 14.48,32.26
N$58  (via drill 1.02 pad 1.88)
  other vias: 14.48,29.72
N$59  (via drill 1.02 pad 1.88)
  other vias: 14.48,27.18
N$60  (via drill 1.02 pad 1.88)
  other vias: 14.48,24.64
N$61  (via drill 1.02 pad 1.88)
  other vias: 14.48,22.1
N$62  (via drill 1.02 pad 1.88)
  other vias: 14.48,19.56
N$63  (via drill 1.02 pad 1.88)
  other vias: 14.48,17.02
N$64  (via drill 1.02 pad 1.88)
  other vias: 14.48,14.48
N$65  (via drill 1.02 pad 1.88)
  other vias: 14.48,11.94
N$66  (via drill 1.02 pad 1.88)
  other vias: 14.48,9.4
N$67  (via drill 1.02 pad 1.88)
  other vias: 17.02,50.04
N$68  (via drill 1.02 pad 1.88)
  other vias: 17.02,47.5
N$69  (via drill 1.02 pad 1.88)
  other vias: 17.02,44.96
N$70  (via drill 1.02 pad 1.88)
  other vias: 17.02,42.42
N$71  (via drill 1.02 pad 1.88)
  other vias: 17.02,39.88
N$72  (via drill 1.02 pad 1.88)
  other vias: 17.02,37.34
N$73  (via drill 1.02 pad 1.88)
  other vias: 17.02,34.8
N$74  (via drill 1.02 pad 1.88)
  other vias: 17.02,32.26
N$75  (via drill 1.02 pad 1.88)
  other vias: 17.02,29.72
N$76  (via drill 1.02 pad 1.88)
  other vias: 17.02,27.18
N$77  (via drill 1.02 pad 1.88)
  other vias: 17.02,24.64
N$78  (via drill 1.02 pad 1.88)
  other vias: 17.02,22.1
N$79  (via drill 1.02 pad 1.88)
  other vias: 17.02,19.56
N$80  (via drill 1.02 pad 1.88)
  other vias: 17.02,17.02
N$81  (via drill 1.02 pad 1.88)
  other vias: 17.02,14.48
N$82  (via drill 1.02 pad 1.88)
  other vias: 17.02,11.94
N$83  (via drill 1.02 pad 1.88)
  other vias: 17.02,9.4
N$84  (via drill 1.02 pad 1.88)
  other vias: 19.56,50.04
N$85  (via drill 1.02 pad 1.88)
  other vias: 19.56,47.5
N$86  (via drill 1.02 pad 1.88)
  other vias: 19.56,44.96
N$87  (via drill 1.02 pad 1.88)
  other vias: 19.56,42.42
N$88  (via drill 1.02 pad 1.88)
  other vias: 19.56,39.88
N$89  (via drill 1.02 pad 1.88)
  other vias: 19.56,37.34
N$90  (via drill 1.02 pad 1.88)
  other vias: 19.56,34.8
N$91  (via drill 1.02 pad 1.88)
  other vias: 19.56,32.26
N$92  (via drill 1.02 pad 1.88)
  other vias: 19.56,29.72
N$93  (via drill 1.02 pad 1.88)
  other vias: 19.56,27.18
N$94  (via drill 1.02 pad 1.88)
  other vias: 19.56,24.64
N$95  (via drill 1.02 pad 1.88)
  other vias: 19.56,22.1
N$96  (via drill 1.02 pad 1.88)
  other vias: 19.56,19.56
N$97  (via drill 1.02 pad 1.88)
  other vias: 19.56,17.02
N$98  (via drill 1.02 pad 1.88)
  other vias: 19.56,14.48
N$99  (via drill 1.02 pad 1.88)
  other vias: 19.56,11.94
N$100  (via drill 1.02 pad 1.88)
  other vias: 19.56,9.4
N$101  (via drill 1.02 pad 1.88)
  other vias: 22.1,50.04
N$102  (via drill 1.02 pad 1.88)
  other vias: 22.1,47.5
N$103  (via drill 1.02 pad 1.88)
  other vias: 22.1,44.96
N$104  (via drill 1.02 pad 1.88)
  other vias: 22.1,42.42
N$105  (via drill 1.02 pad 1.88)
  other vias: 22.1,39.88
N$106  (via drill 1.02 pad 1.88)
  other vias: 22.1,37.34
N$107  (via drill 1.02 pad 1.88)
  other vias: 22.1,34.8
N$108  (via drill 1.02 pad 1.88)
  other vias: 22.1,32.26
N$109  (via drill 1.02 pad 1.88)
  other vias: 22.1,29.72
N$110  (via drill 1.02 pad 1.88)
  other vias: 22.1,27.18
N$111  (via drill 1.02 pad 1.88)
  other vias: 22.1,24.64
N$112  (via drill 1.02 pad 1.88)
  other vias: 22.1,22.1
N$113  (via drill 1.02 pad 1.88)
  other vias: 22.1,19.56
N$114  (via drill 1.02 pad 1.88)
  other vias: 22.1,17.02
N$115  (via drill 1.02 pad 1.88)
  other vias: 22.1,14.48
N$116  (via drill 1.02 pad 1.88)
  other vias: 22.1,11.94
N$117  (via drill 1.02 pad 1.88)
  other vias: 22.1,9.4
N$118  (via drill 1.02 pad 1.88)
  other vias: 24.64,50.04
N$119  (via drill 1.02 pad 1.88)
  other vias: 24.64,47.5
N$120  (via drill 1.02 pad 1.88)
  other vias: 24.64,44.96
N$121  (via drill 1.02 pad 1.88)
  other vias: 24.64,42.42
N$122  (via drill 1.02 pad 1.88)
  other vias: 24.64,39.88
N$123  (via drill 1.02 pad 1.88)
  other vias: 24.64,37.34
N$124  (via drill 1.02 pad 1.88)
  other vias: 24.64,34.8
N$125  (via drill 1.02 pad 1.88)
  other vias: 24.64,32.26
N$126  (via drill 1.02 pad 1.88)
  other vias: 24.64,29.72
N$127  (via drill 1.02 pad 1.88)
  other vias: 24.64,27.18
N$128  (via drill 1.02 pad 1.88)
  other vias: 24.64,24.64
N$129  (via drill 1.02 pad 1.88)
  other vias: 24.64,22.1
N$130  (via drill 1.02 pad 1.88)
  other vias: 24.64,19.56
N$131  (via drill 1.02 pad 1.88)
  other vias: 24.64,17.02
N$132  (via drill 1.02 pad 1.88)
  other vias: 24.64,14.48
N$133  (via drill 1.02 pad 1.88)
  other vias: 24.64,11.94
N$134
  Top 0.254: U5.5 111.37,39.24 C9.2
N$135  (via drill 1.02 pad 1.88)
  other vias: 27.18,50.04
N$136  (via drill 1.02 pad 1.88)
  other vias: 27.18,47.5
N$137  (via drill 1.02 pad 1.88)
  other vias: 27.18,44.96
N$138  (via drill 1.02 pad 1.88)
  other vias: 27.18,42.42
N$139  (via drill 1.02 pad 1.88)
  other vias: 27.18,39.88
N$140  (via drill 1.02 pad 1.88)
  other vias: 27.18,37.34
N$141  (via drill 1.02 pad 1.88)
  other vias: 27.18,34.8
N$142  (via drill 1.02 pad 1.88)
  other vias: 27.18,32.26
N$143  (via drill 1.02 pad 1.88)
  other vias: 27.18,29.72
N$144  (via drill 1.02 pad 1.88)
  other vias: 27.18,27.18
N$145  (via drill 1.02 pad 1.88)
  other vias: 27.18,24.64
N$146  (via drill 1.02 pad 1.88)
  other vias: 27.18,22.1
N$147  (via drill 1.02 pad 1.88)
  other vias: 27.18,19.56
N$148  (via drill 1.02 pad 1.88)
  other vias: 27.18,17.02
N$149
  Top 0.254: R4.2 107.13,48.4 108.9,48.4 C10.2 110.36,48.58 111,47.95 111,43.69 110.36,43.05 U5.8
N$150
  Top 0.254: U5.6 109.86,40.51 110.49,41.15 C11.2
N$151
  Top 0.254: U6.5 111.07,22.48 111.38,22.17 111.38,19.93 C13.2
N$152  (via drill 1.02 pad 1.88)
  other vias: 29.72,50.04
N$153  (via drill 1.02 pad 1.88)
  other vias: 29.72,47.5
N$154  (via drill 1.02 pad 1.88)
  other vias: 29.72,44.96
N$155  (via drill 1.02 pad 1.88)
  other vias: 29.72,42.42
N$156  (via drill 1.02 pad 1.88)
  other vias: 29.72,39.88
N$157  (via drill 1.02 pad 1.88)
  other vias: 29.72,37.34
N$158  (via drill 1.02 pad 1.88)
  other vias: 29.72,34.8
N$159  (via drill 1.02 pad 1.88)
  other vias: 29.72,32.26
N$160  (via drill 1.02 pad 1.88)
  other vias: 29.72,29.72
N$161  (via drill 1.02 pad 1.88)
  other vias: 29.72,27.18
N$162  (via drill 1.02 pad 1.88)
  other vias: 29.72,24.64
N$163  (via drill 1.02 pad 1.88)
  other vias: 29.72,22.1
N$164  (via drill 1.02 pad 1.88)
  other vias: 29.72,19.56
N$165  (via drill 1.02 pad 1.88)
  other vias: 29.72,17.02
N$166  (via drill 1.02 pad 1.88)
  other vias: 9.4,52.58
N$167  (via drill 1.02 pad 1.88)
  other vias: 11.94,52.58
N$168  (via drill 1.02 pad 1.88)
  other vias: 14.48,52.58
N$169  (via drill 1.02 pad 1.88)
  other vias: 32.26,50.04
N$170  (via drill 1.02 pad 1.88)
  other vias: 32.26,47.5
N$171  (via drill 1.02 pad 1.88)
  other vias: 32.26,44.96
N$172  (via drill 1.02 pad 1.88)
  other vias: 32.26,42.42
N$173  (via drill 1.02 pad 1.88)
  other vias: 32.26,39.88
N$174  (via drill 1.02 pad 1.88)
  other vias: 32.26,37.34
N$175  (via drill 1.02 pad 1.88)
  other vias: 32.26,34.8
N$176  (via drill 1.02 pad 1.88)
  other vias: 32.26,32.26
N$177  (via drill 1.02 pad 1.88)
  other vias: 32.26,29.72
N$178  (via drill 1.02 pad 1.88)
  other vias: 32.26,27.18
N$179  (via drill 1.02 pad 1.88)
  other vias: 32.26,24.64
N$180  (via drill 1.02 pad 1.88)
  other vias: 32.26,22.1
N$181  (via drill 1.02 pad 1.88)
  other vias: 32.26,19.56
N$182  (via drill 1.02 pad 1.88)
  other vias: 32.26,17.02
N$183  (via drill 1.02 pad 1.88)
  other vias: 34.8,50.04
N$184  (via drill 1.02 pad 1.88)
  other vias: 34.8,47.5
N$185  (via drill 1.02 pad 1.88)
  other vias: 34.8,44.96
N$186  (via drill 1.02 pad 1.88)
  other vias: 34.8,42.42
N$187  (via drill 1.02 pad 1.88)
  other vias: 34.8,39.88
N$188  (via drill 1.02 pad 1.88)
  other vias: 34.8,37.34
N$189  (via drill 1.02 pad 1.88)
  other vias: 34.8,34.8
N$190  (via drill 1.02 pad 1.88)
  other vias: 34.8,32.26
N$191  (via drill 1.02 pad 1.88)
  other vias: 34.8,29.72
N$192  (via drill 1.02 pad 1.88)
  other vias: 34.8,27.18
N$193  (via drill 1.02 pad 1.88)
  other vias: 34.8,24.64
N$194  (via drill 1.02 pad 1.88)
  other vias: 34.8,22.1
N$195  (via drill 1.02 pad 1.88)
  other vias: 34.8,19.56
N$196  (via drill 1.02 pad 1.88)
  other vias: 34.8,17.02
N$197
  Top 0.254: U6.8 110.11,26.29 111,27.18 111,31.09 110.05,32.04 C14.2 R5.2
N$198
  Top 0.254: U6.6 112.04,23.75 114.81,26.52 C15.2
N$199
  Top 0.254: D2.A R6.1
N$200
  Top 0.254: JP7.2 U4.D7
N$201
  Top 0.254: JP8.1 U4.D8
N$202
  Top 0.254: JP8.2 U4.D9
N$203
  Top 0.254: JP8.3 U4.D10
N$204
  Top 0.254: JP8.4 U4.D11
N$205
  Top 0.254: JP8.5 U4.D12
N$206
  Top 0.254: JP8.6 U4.D13
N$207  (via drill 1.02 pad 1.88)
  other vias: 72.9,50.04
N$208  (via drill 1.02 pad 1.88)
  other vias: 72.9,47.5
N$209  (via drill 1.02 pad 1.88)
  other vias: 72.9,44.96
N$210  (via drill 1.02 pad 1.88)
  other vias: 72.9,42.42
N$211  (via drill 1.02 pad 1.88)
  other vias: 72.9,39.88
N$212  (via drill 1.02 pad 1.88)
  other vias: 72.9,37.34
N$213  (via drill 1.02 pad 1.88)
  other vias: 72.9,34.8
N$214  (via drill 1.02 pad 1.88)
  other vias: 72.9,32.26
N$215  (via drill 1.02 pad 1.88)
  other vias: 72.9,29.72
N$216  (via drill 1.02 pad 1.88)
  other vias: 72.9,27.18
N$217  (via drill 1.02 pad 1.88)
  other vias: 72.9,24.64
N$218  (via drill 1.02 pad 1.88)
  other vias: 72.9,22.1
N$219  (via drill 1.02 pad 1.88)
  other vias: 72.9,19.56
N$220  (via drill 1.02 pad 1.88)
  other vias: 72.9,17.02
N$221  (via drill 1.02 pad 1.88)
  other vias: 72.9,14.48
N$222  (via drill 1.02 pad 1.88)
  other vias: 72.9,11.94
N$223  (via drill 1.02 pad 1.88)
  other vias: 72.9,9.4
N$224  (via drill 1.02 pad 1.88)
  other vias: 75.44,50.04
N$225  (via drill 1.02 pad 1.88)
  other vias: 75.44,47.5
N$226  (via drill 1.02 pad 1.88)
  other vias: 75.44,44.96
N$227  (via drill 0.51)
  Top 0.254: S1.4 49.51,17.91 v49.43,17.98
  Bottom 0.254: U1.RES 30.99,10.67 32.26,11.94 44.07,11.94 49.43,17.3 v49.43,17.98
N$228  (via drill 1.02 pad 1.88)
  other vias: 75.44,42.42
N$229  (via drill 1.02 pad 1.88)
  other vias: 75.44,39.88
N$230  (via drill 1.02 pad 1.88)
  other vias: 75.44,37.34
N$231  (via drill 1.02 pad 1.88)
  other vias: 75.44,34.8
N$232  (via drill 1.02 pad 1.88)
  other vias: 75.44,32.26
N$233  (via drill 1.02 pad 1.88)
  other vias: 75.44,29.72
N$234  (via drill 1.02 pad 1.88)
  other vias: 75.44,27.18
N$235  (via drill 1.02 pad 1.88)
  other vias: 75.44,24.64
N$236  (via drill 1.02 pad 1.88)
  other vias: 75.44,22.1
N$237  (via drill 1.02 pad 1.88)
  other vias: 75.44,19.56
N$238  (via drill 1.02 pad 1.88)
  other vias: 75.44,17.02
N$239  (via drill 1.02 pad 1.88)
  other vias: 75.44,14.48
N$240  (via drill 1.02 pad 1.88)
  other vias: 75.44,11.94
N$241  (via drill 1.02 pad 1.88)
  other vias: 75.44,9.4
N$242  (via drill 1.02 pad 1.88)
  other vias: 77.98,50.04
N$243  (via drill 1.02 pad 1.88)
  other vias: 77.98,47.5
N$244  (via drill 1.02 pad 1.88)
  other vias: 77.98,44.96
N$245  (via drill 1.02 pad 1.88)
  other vias: 77.98,42.42
N$246  (via drill 1.02 pad 1.88)
  other vias: 77.98,39.88
N$247  (via drill 1.02 pad 1.88)
  other vias: 77.98,37.34
N$248  (via drill 1.02 pad 1.88)
  other vias: 77.98,34.8
N$249  (via drill 1.02 pad 1.88)
  other vias: 77.98,32.26
N$250  (via drill 1.02 pad 1.88)
  other vias: 77.98,29.72
N$251  (via drill 1.02 pad 1.88)
  other vias: 77.98,27.18
N$252  (via drill 1.02 pad 1.88)
  other vias: 77.98,24.64
N$253  (via drill 1.02 pad 1.88)
  other vias: 77.98,22.1
N$254  (via drill 1.02 pad 1.88)
  other vias: 77.98,19.56
N$255  (via drill 1.02 pad 1.88)
  other vias: 77.98,17.02
N$256  (via drill 1.02 pad 1.88)
  other vias: 77.98,14.48
N$257  (via drill 1.02 pad 1.88)
  other vias: 77.98,11.94
N$258  (via drill 1.02 pad 1.88)
  other vias: 77.98,9.4
N$259  (via drill 1.02 pad 1.88)
  other vias: 80.52,50.04
N$260  (via drill 1.02 pad 1.88)
  other vias: 80.52,47.5
N$261  (via drill 1.02 pad 1.88)
  other vias: 80.52,44.96
N$262  (via drill 1.02 pad 1.88)
  other vias: 80.52,42.42
N$263  (via drill 1.02 pad 1.88)
  other vias: 80.52,39.88
N$264  (via drill 1.02 pad 1.88)
  other vias: 80.52,37.34
N$265  (via drill 1.02 pad 1.88)
  other vias: 80.52,34.8
N$266  (via drill 1.02 pad 1.88)
  other vias: 80.52,32.26
N$267  (via drill 1.02 pad 1.88)
  other vias: 80.52,29.72
N$268  (via drill 1.02 pad 1.88)
  other vias: 80.52,27.18
N$269  (via drill 1.02 pad 1.88)
  other vias: 80.52,24.64
N$270  (via drill 1.02 pad 1.88)
  other vias: 80.52,22.1
N$271  (via drill 1.02 pad 1.88)
  other vias: 80.52,19.56
N$272  (via drill 1.02 pad 1.88)
  other vias: 80.52,17.02
N$273  (via drill 1.02 pad 1.88)
  other vias: 80.52,14.48
N$274  (via drill 1.02 pad 1.88)
  other vias: 80.52,11.94
N$275  (via drill 1.02 pad 1.88)
  other vias: 80.52,9.4
N$276  (via drill 1.02 pad 1.88)
  other vias: 83.06,50.04
N$277  (via drill 1.02 pad 1.88)
  other vias: 83.06,47.5
N$278  (via drill 1.02 pad 1.88)
  other vias: 83.06,44.96
N$279  (via drill 1.02 pad 1.88)
  other vias: 83.06,42.42
N$280  (via drill 1.02 pad 1.88)
  other vias: 83.06,39.88
N$281  (via drill 1.02 pad 1.88)
  other vias: 83.06,37.34
N$282  (via drill 1.02 pad 1.88)
  other vias: 83.06,34.8
N$283  (via drill 1.02 pad 1.88)
  other vias: 83.06,32.26
N$284  (via drill 1.02 pad 1.88)
  other vias: 83.06,29.72
N$285  (via drill 1.02 pad 1.88)
  other vias: 83.06,27.18
N$286  (via drill 1.02 pad 1.88)
  other vias: 83.06,24.64
N$287  (via drill 1.02 pad 1.88)
  other vias: 83.06,22.1
N$288  (via drill 1.02 pad 1.88)
  other vias: 83.06,19.56
N$289  (via drill 1.02 pad 1.88)
  other vias: 83.06,17.02
N$290  (via drill 1.02 pad 1.88)
  other vias: 83.06,14.48
N$291  (via drill 1.02 pad 1.88)
  other vias: 83.06,11.94
N$292  (via drill 1.02 pad 1.88)
  other vias: 83.06,9.4
N$293  (via drill 1.02 pad 1.88)
  other vias: 85.6,50.04
N$294  (via drill 1.02 pad 1.88)
  other vias: 85.6,47.5
N$295  (via drill 1.02 pad 1.88)
  other vias: 85.6,44.96
N$296  (via drill 1.02 pad 1.88)
  other vias: 85.6,42.42
N$297  (via drill 1.02 pad 1.88)
  other vias: 85.6,39.88
N$298  (via drill 1.02 pad 1.88)
  other vias: 85.6,37.34
N$299  (via drill 1.02 pad 1.88)
  other vias: 85.6,34.8
N$300  (via drill 1.02 pad 1.88)
  other vias: 85.6,32.26
N$301  (via drill 1.02 pad 1.88)
  other vias: 85.6,29.72
N$302  (via drill 1.02 pad 1.88)
  other vias: 85.6,27.18
N$303  (via drill 1.02 pad 1.88)
  other vias: 85.6,24.64
N$304  (via drill 1.02 pad 1.88)
  other vias: 85.6,22.1
N$305  (via drill 1.02 pad 1.88)
  other vias: 85.6,19.56
N$306  (via drill 1.02 pad 1.88)
  other vias: 85.6,17.02
N$307  (via drill 1.02 pad 1.88)
  other vias: 85.6,14.48
N$308  (via drill 1.02 pad 1.88)
  other vias: 85.6,11.94
N$309  (via drill 1.02 pad 1.88)
  other vias: 85.6,9.4
N$310  (via drill 1.02 pad 1.88)
  other vias: 88.14,50.04
N$311  (via drill 1.02 pad 1.88)
  other vias: 88.14,47.5
N$312  (via drill 1.02 pad 1.88)
  other vias: 88.14,44.96
N$313  (via drill 1.02 pad 1.88)
  other vias: 88.14,42.42
N$314  (via drill 1.02 pad 1.88)
  other vias: 88.14,39.88
N$315  (via drill 1.02 pad 1.88)
  other vias: 88.14,37.34
N$316  (via drill 1.02 pad 1.88)
  other vias: 88.14,34.8
N$317  (via drill 1.02 pad 1.88)
  other vias: 88.14,32.26
N$318  (via drill 1.02 pad 1.88)
  other vias: 88.14,29.72
N$319  (via drill 1.02 pad 1.88)
  other vias: 88.14,27.18
N$320  (via drill 1.02 pad 1.88)
  other vias: 88.14,24.64
N$321  (via drill 1.02 pad 1.88)
  other vias: 88.14,22.1
N$322  (via drill 1.02 pad 1.88)
  other vias: 88.14,19.56
N$323  (via drill 1.02 pad 1.88)
  other vias: 88.14,17.02
N$324  (via drill 1.02 pad 1.88)
  other vias: 88.14,14.48
N$325  (via drill 1.02 pad 1.88)
  other vias: 88.14,11.94
N$326  (via drill 1.02 pad 1.88)
  other vias: 90.68,50.04
N$327  (via drill 1.02 pad 1.88)
  other vias: 90.68,47.5
N$328  (via drill 1.02 pad 1.88)
  other vias: 90.68,44.96
N$329  (via drill 1.02 pad 1.88)
  other vias: 90.68,42.42
N$330  (via drill 1.02 pad 1.88)
  other vias: 90.68,39.88
N$331  (via drill 1.02 pad 1.88)
  other vias: 90.68,37.34
N$332  (via drill 1.02 pad 1.88)
  other vias: 90.68,34.8
N$333  (via drill 1.02 pad 1.88)
  other vias: 90.68,32.26
N$334  (via drill 1.02 pad 1.88)
  other vias: 90.68,29.72
N$335  (via drill 1.02 pad 1.88)
  other vias: 90.68,27.18
N$336  (via drill 1.02 pad 1.88)
  other vias: 90.68,24.64
N$337  (via drill 1.02 pad 1.88)
  other vias: 90.68,22.1
N$338  (via drill 1.02 pad 1.88)
  other vias: 90.68,19.56
N$339  (via drill 1.02 pad 1.88)
  other vias: 90.68,17.02
N$340  (via drill 1.02 pad 1.88)
  other vias: 93.22,50.04
N$341  (via drill 1.02 pad 1.88)
  other vias: 93.22,47.5
N$342  (via drill 1.02 pad 1.88)
  other vias: 93.22,44.96
N$343  (via drill 1.02 pad 1.88)
  other vias: 93.22,42.42
N$344  (via drill 1.02 pad 1.88)
  other vias: 93.22,39.88
N$345  (via drill 1.02 pad 1.88)
  other vias: 93.22,37.34
N$346  (via drill 1.02 pad 1.88)
  other vias: 93.22,34.8
N$347  (via drill 1.02 pad 1.88)
  other vias: 93.22,32.26
N$348  (via drill 1.02 pad 1.88)
  other vias: 93.22,29.72
N$349  (via drill 1.02 pad 1.88)
  other vias: 93.22,27.18
N$350  (via drill 1.02 pad 1.88)
  other vias: 93.22,24.64
N$351  (via drill 1.02 pad 1.88)
  other vias: 93.22,22.1
N$352  (via drill 1.02 pad 1.88)
  other vias: 93.22,19.56
N$353  (via drill 1.02 pad 1.88)
  other vias: 93.22,17.02
N$354  (via drill 1.02 pad 1.88)
  other vias: 95.76,50.04
N$355  (via drill 1.02 pad 1.88)
  other vias: 95.76,47.5
N$356  (via drill 1.02 pad 1.88)
  other vias: 95.76,44.96
N$357  (via drill 1.02 pad 1.88)
  other vias: 95.76,42.42
N$358  (via drill 1.02 pad 1.88)
  other vias: 95.76,39.88
N$359  (via drill 1.02 pad 1.88)
  other vias: 95.76,37.34
N$360  (via drill 1.02 pad 1.88)
  other vias: 95.76,34.8
N$361  (via drill 1.02 pad 1.88)
  other vias: 95.76,32.26
N$362  (via drill 1.02 pad 1.88)
  other vias: 95.76,29.72
N$363  (via drill 1.02 pad 1.88)
  other vias: 95.76,27.18
N$364  (via drill 1.02 pad 1.88)
  other vias: 95.76,24.64
N$365  (via drill 1.02 pad 1.88)
  other vias: 95.76,22.1
N$366  (via drill 1.02 pad 1.88)
  other vias: 95.76,19.56
N$367  (via drill 1.02 pad 1.88)
  other vias: 95.76,17.02
N$368  (via drill 1.02 pad 1.88)
  other vias: 98.3,50.04
N$369  (via drill 1.02 pad 1.88)
  other vias: 98.3,47.5
N$370  (via drill 1.02 pad 1.88)
  other vias: 98.3,44.96
N$371  (via drill 1.02 pad 1.88)
  other vias: 98.3,42.42
N$372  (via drill 1.02 pad 1.88)
  other vias: 98.3,39.88
N$373  (via drill 1.02 pad 1.88)
  other vias: 98.3,37.34
N$374  (via drill 1.02 pad 1.88)
  other vias: 98.3,34.8
N$375  (via drill 1.02 pad 1.88)
  other vias: 98.3,32.26
N$376  (via drill 1.02 pad 1.88)
  other vias: 98.3,29.72
N$377  (via drill 1.02 pad 1.88)
  other vias: 98.3,27.18
N$378  (via drill 1.02 pad 1.88)
  other vias: 98.3,24.64
N$379  (via drill 1.02 pad 1.88)
  other vias: 98.3,22.1
N$380  (via drill 1.02 pad 1.88)
  other vias: 98.3,19.56
N$381  (via drill 1.02 pad 1.88)
  other vias: 98.3,17.02
N$382  (via drill 1.02 pad 1.88)
  other vias: 72.9,52.58
N$383  (via drill 1.02 pad 1.88)
  other vias: 75.44,52.58
N$384  (via drill 1.02 pad 1.88)
  other vias: 77.98,52.58
N$385  (via drill 0.51)
  Top 0.254: S2.4 113,17.91 v112.93,17.98
  Bottom 0.254: U4.RES 94.49,10.67 95.76,11.94 107.57,11.94 112.93,17.3 v112.93,17.98
N$386
  Top 0.254: JP7.1 U4.D6
N$387
  Top 0.254: U8.5 174.87,39.24 C17.2
N$388
  Top 0.254: R7.2 170.63,48.4 172.4,48.4 C18.2 173.86,48.58 174.5,47.95 174.5,43.69 173.86,43.05 U8.8
N$389
  Top 0.254: U8.6 173.35,40.51 173.99,41.15 C19.2
N$390
  Top 0.254: U9.5 174.57,22.48 174.88,22.17 174.88,19.93 C21.2
N$391
  Top 0.254: U9.8 173.61,26.29 174.5,27.18 174.5,31.09 173.55,32.04 C22.2 R8.2
N$392
  Top 0.254: U9.6 175.54,23.75 178.31,26.52 C23.2
N$393
  Top 0.254: D3.A R9.1
N$394
  Top 0.254: JP13.2 U7.D7
N$395
  Top 0.254: JP14.1 U7.D8
N$396
  Top 0.254: JP14.2 U7.D9
N$397
  Top 0.254: JP14.3 U7.D10
N$398
  Top 0.254: JP14.4 U7.D11
N$399
  Top 0.254: JP14.5 U7.D12
N$400
  Top 0.254: JP14.6 U7.D13
N$401  (via drill 1.02 pad 1.88)
  other vias: 136.4,50.04
N$402  (via drill 1.02 pad 1.88)
  other vias: 136.4,47.5
N$403  (via drill 1.02 pad 1.88)
  other vias: 136.4,44.96
N$404  (via drill 1.02 pad 1.88)
  other vias: 136.4,42.42